# Altium PCB thymio2-main.PcbDoc (part 1 of 4)
Units mm, origin at the board's own origin, x right, y up, seen from the top; angles counter-clockwise.
Board outline 107 x 105.75 mm, 2 copper layers (Top Layer, Bottom Layer), stack 1.591 mm thick; 334 components, 247 nets, 987 pads, 487 vias.
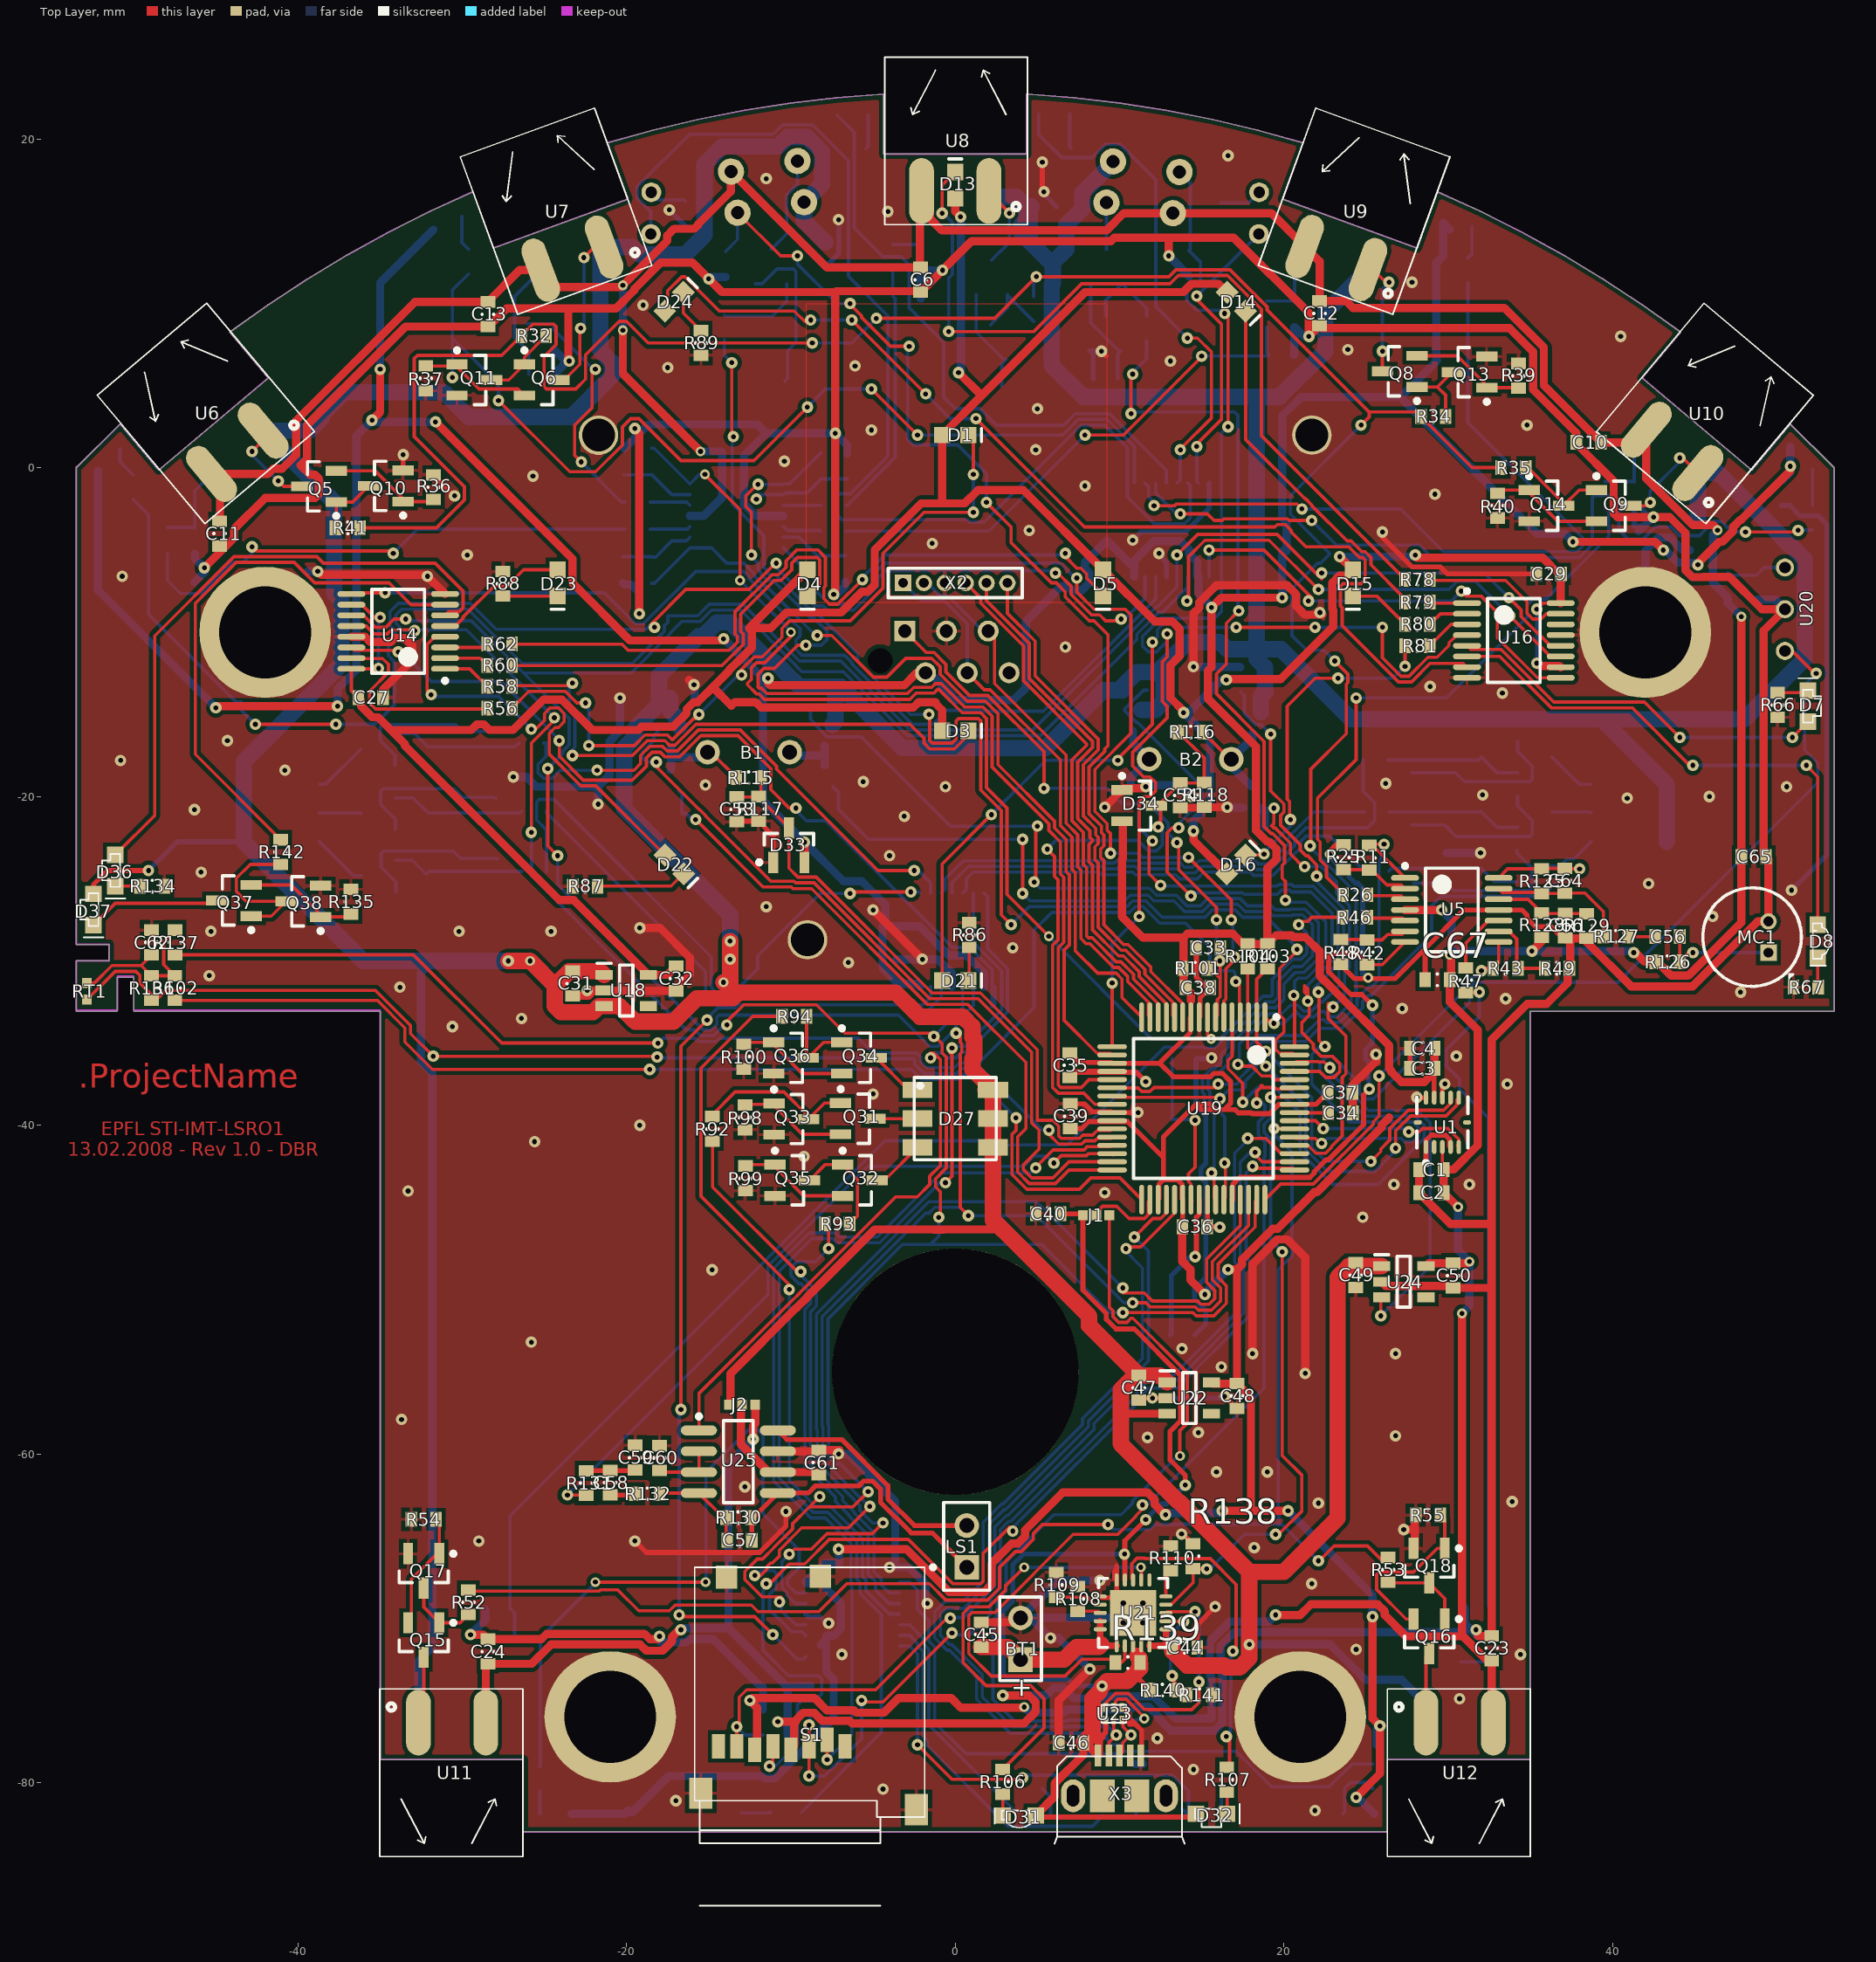
[diagram p0: Top Layer view]
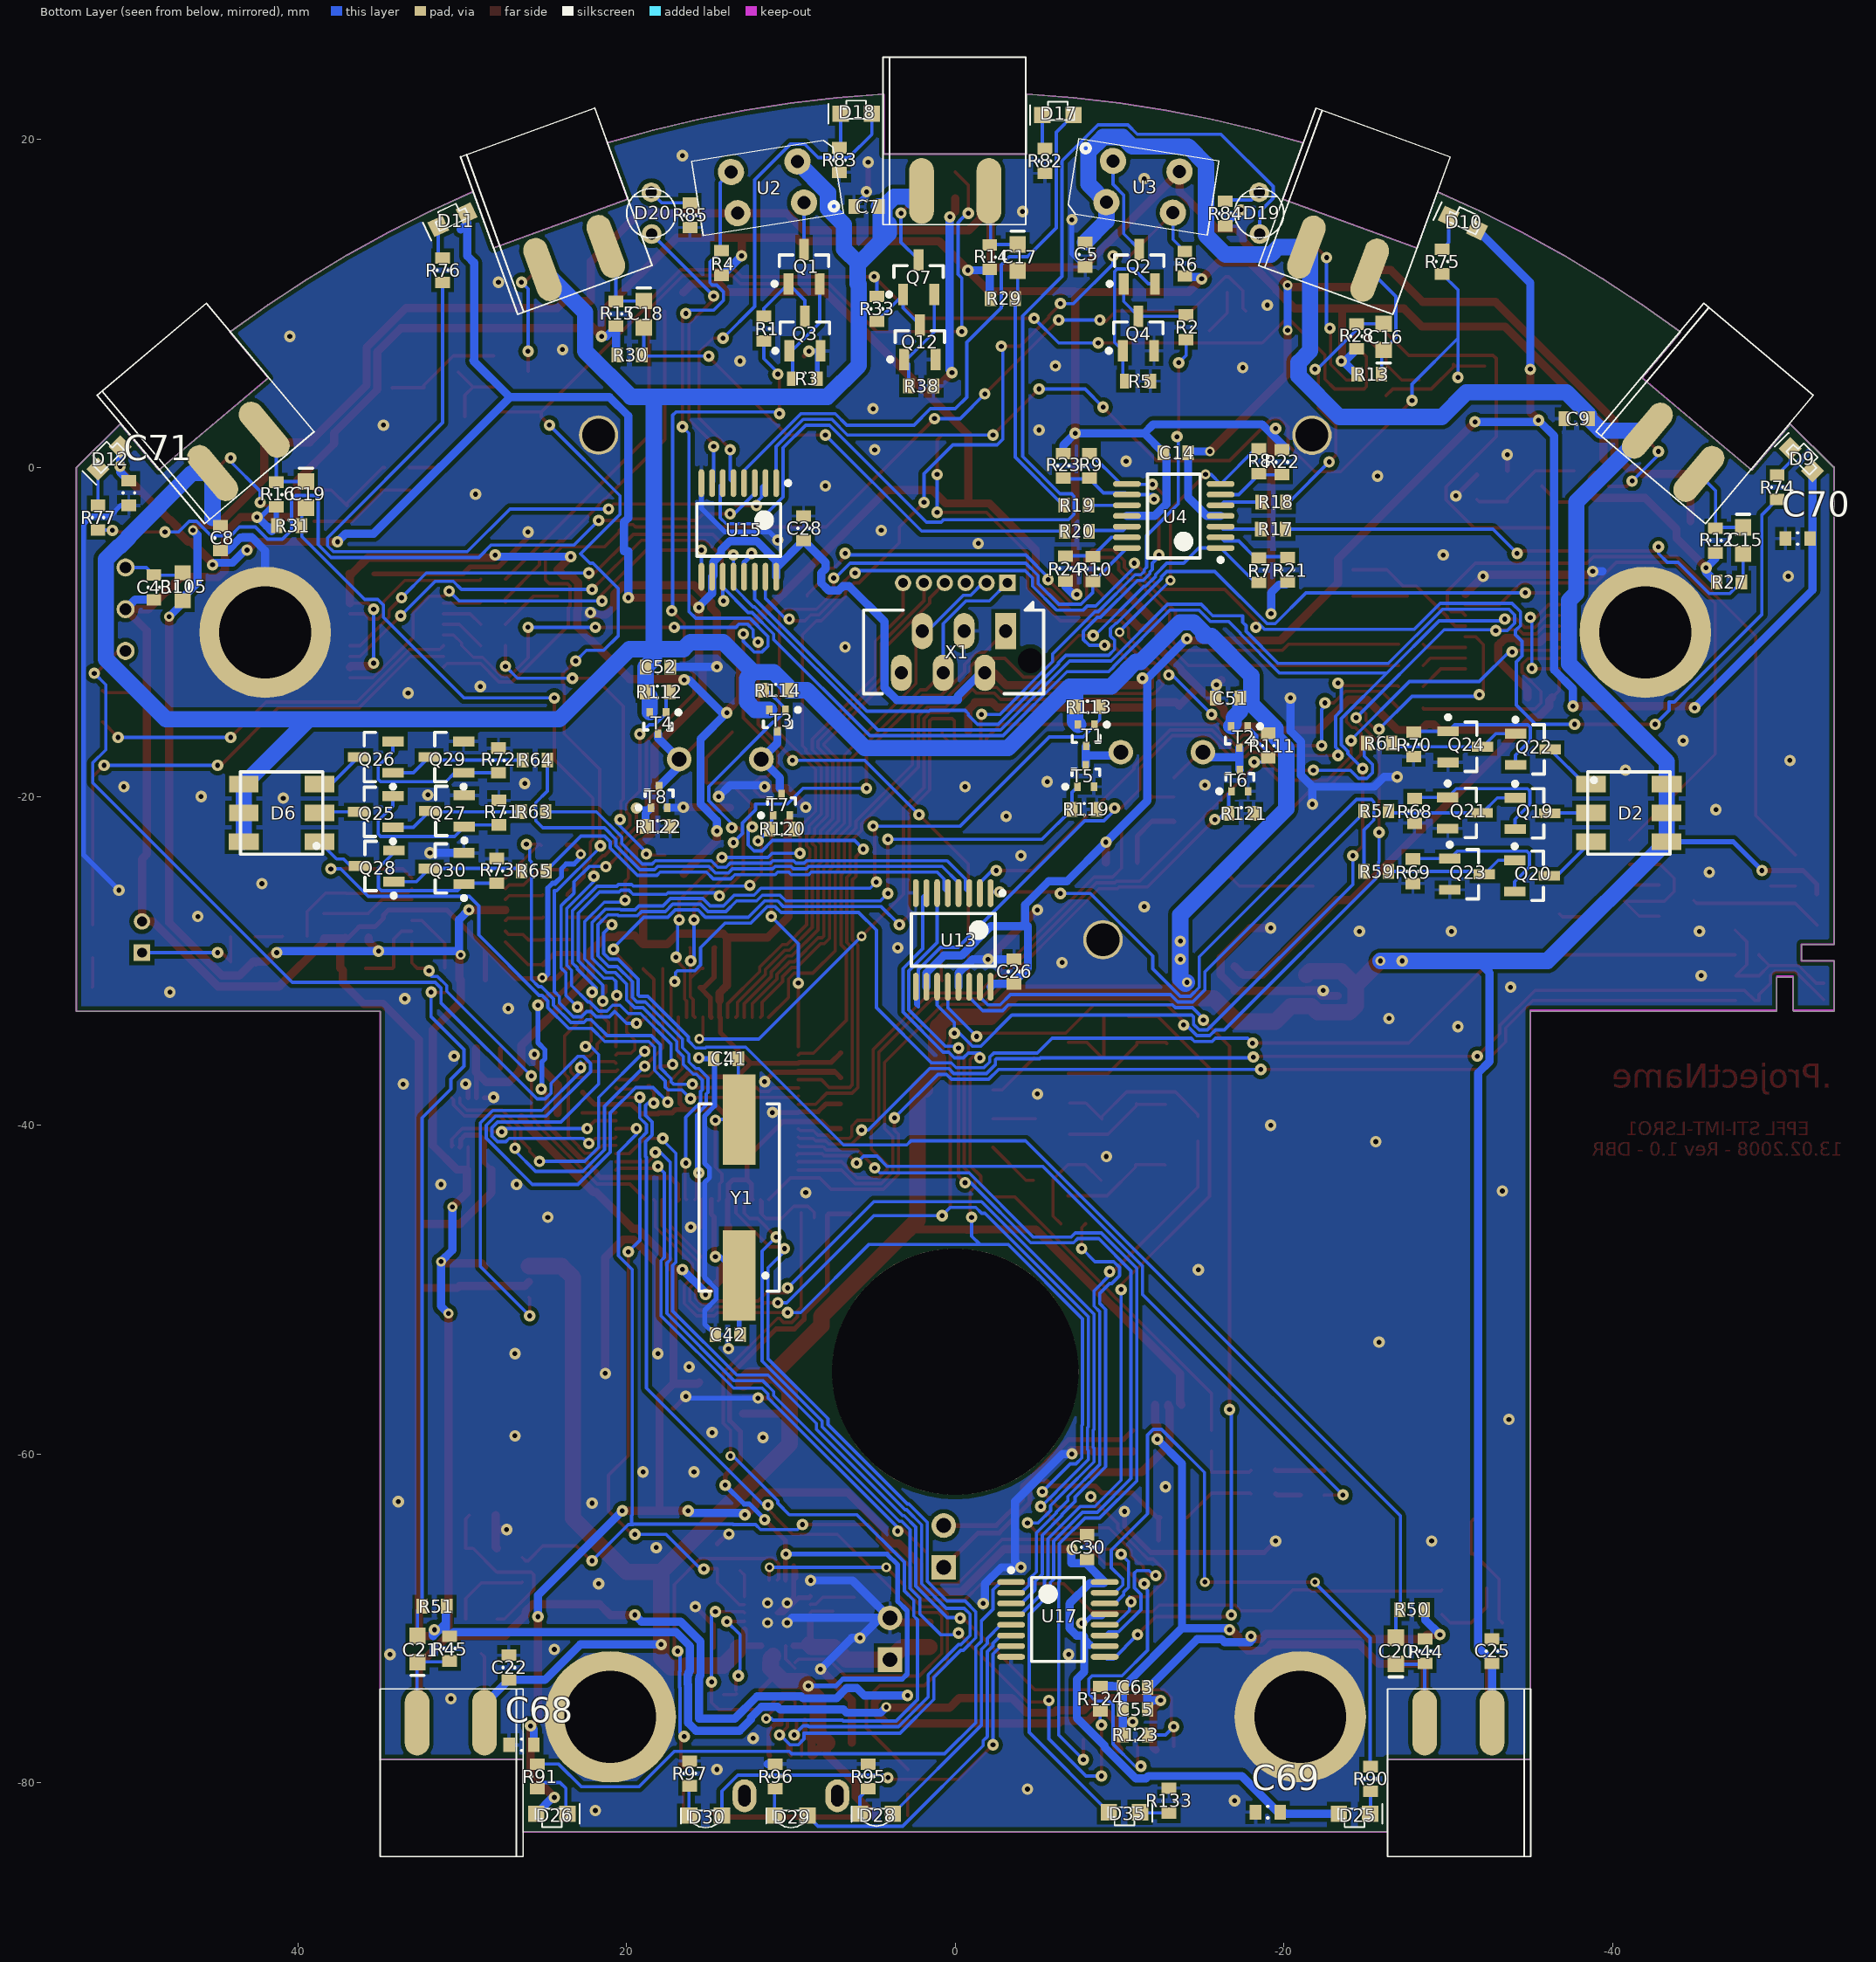
[diagram p1: Bottom Layer view, seen from below]

## Layer stack, top to bottom
Top Layer: signal copper 0.0356
Dielectric: core 1.52, FR-4, Dk 4.8
Bottom Layer: signal copper 0.0356

## Board outline
-53.5,-33.068 -51,-33.068 -51,-31 -50,-31 -50,-33.068 -35,-33.068 -35,-78.6 -26.3,-78.6 -26.3,-83 26.3,-83 26.3,-78.6 35,-78.6 35,-33.068 53.5,-33.068 53.5,0 50.816,2.669 48.472,-0.125 41.807,5.467 44.152,8.261 41.829,9.919 39.444,11.487 37,12.961 34.501,14.34 31.951,15.622 29.353,16.805 28.106,13.377 19.931,16.353 21.178,19.78 18.428,20.544 15.651,21.201 12.85,21.751 10.03,22.193 7.195,22.525 4.35,22.747 4.35,19.1 -4.35,19.1 -4.35,22.747 -7.195,22.525 -10.03,22.193 -12.85,21.751 -15.651,21.201 -18.428,20.544 -21.178,19.78 -19.931,16.353 -28.106,13.377 -29.353,16.805 -31.951,15.622 -34.501,14.34 -37,12.961 -39.444,11.487 -41.829,9.919 -44.152,8.261 -41.807,5.467 -48.472,-0.125 -50.816,2.669 -53.5,0 -53.5,-29 -51.5,-29 -51.5,-30 -53.5,-30

## Design rules (kind name [scope] priority, off if disabled: settings)
AcuteAngle [All] p1 off: minimum=8.80000000000000E+0001
Clearance Clearance_UnderCameraPolygon [INNamedPolygon('UnderCameraPolygon')] p1: gap=0.25
Clearance Clearance_Polygon [InPolygon AND not InNamedPolygon('UnderCameraPolygon')] p2: gap=0.25
Clearance Clearance_Normal [All] p3: gap=0.15
ComponentClearance ComponentLed_onde [(HasFootprint('DIOC1608X08N'))] p1: gap=0.1 collisioncheckmode=3 verticalgap=0.1 showdistances=TRUE
ComponentClearance ComponentSensors [(HasFootprint('ITR9909_EDGE'))OR (HasFootprint('ITR9909_LONG')) vs HasGenericStepModel  And  Not InComponentClass('All Components')] p2: gap=0.1 collisioncheckmode=3 verticalgap=0.1 showdistances=FALSE
ComponentClearance "ComponentClearance_Coque entre ellle" [HasGenericStepModel  And  Not InComponentClass('All Components') vs HasGenericStepModel  And  Not InComponentClass('All Components')] p3: gap=0 collisioncheckmode=3 verticalgap=0 showdistances=FALSE
ComponentClearance [All] p4: gap=0.2 collisioncheckmode=3 verticalgap=0.2 showdistances=TRUE
FabricationTestPointUsage TestPointUsage [All] p1: valid=0 allowmultiple=FALSE
FabricationTestpoint Testpoint [All] p1: side=3 testpointundercomponent=TRUE minsize=1.016 maxsize=2.54 preferedsize=1.524 minholesize=0 maxholesize=1.016 preferedholesize=0.813 testpointgrid=0.025 allowsidetop=TRUE allowsidebottom=TRUE usegrid=TRUE gridtolerance=0
Height [All] p1 off: minheight=0 maxheight=25.4 prefheight=12.7
HoleSize [All] p1: absolutevalues=TRUE maxlimit=6 minlimit=0.3 maxpercent=80.000 minpercent=20.000
MinimumAnnularRing [All] p1: minimumring=0.15
MinimumSolderMaskSliver [All] p1: minsoldermaskwidth=0.2
PlaneClearance [All] p1: clearance=0.4
PlaneConnect [All] p1: planeconnectstyle=Relief reliefexpansion=0.508 reliefentries=4 reliefconductorwidth=0.2 reliefairgap=0.254
PolygonConnect PolygonConnect_BigHole [ispad and (HoleSize >= 2.0)] p1: connectstyle=Direct reliefconductorwidth=0.254 reliefentries=4 polygonreliefangle="90 Angle"
PolygonConnect PolygonConnect_Via [IsVia] p2: connectstyle=Direct reliefconductorwidth=0.254 reliefentries=4 polygonreliefangle="90 Angle"
PolygonConnect PolygonConnect_DirectConnect [(ispad and (PadXSize_AllLayers >= 4.0))] p3: connectstyle=Direct reliefconductorwidth=0.254 reliefentries=4 polygonreliefangle="90 Angle"
PolygonConnect PolygonConnect_NoConnect [HasFootprint('SAMTEC_FTS*')] p4 off: connectstyle=NoConnect reliefconductorwidth=0.254 reliefentries=4 polygonreliefangle="90 Angle"
PolygonConnect [All] p5: connectstyle=Relief reliefconductorwidth=0.2 reliefentries=4 polygonreliefangle="90 Angle"
RoomDefinition SDcard [InComponentClass('SDcard')] p1: confinementstyle=ConfineIn formatcopy=TRUE lockcomponents=FALSE outline -16.492,-87.75 -16.492,-66.448 -1.358,-66.448 -1.358,-87.75
RoomDefinition Motors [InComponentClass('Motors')] p2 off: confinementstyle=ConfineIn formatcopy=TRUE lockcomponents=FALSE outline -22.9,-13.025 -22.9,-10.325 -22.6,-7.4 -19.275,-5.95 -15.025,-5.95 28.825,-6.2 29.025,-13.525 29.025,-16.225 28.825,-17.45 21.275,-17.6 18.425,-17.6 -22.725,-17.1
RoomDefinition ACC [InComponentClass('ACC')] p3: confinementstyle=ConfineIn formatcopy=TRUE lockcomponents=FALSE outline 27,-37.3 27,-34.55 29.85,-34.55 32,-37.475 32,-42.75 30.4,-44.875 27.55,-44.875 27.3,-42.75
RoutingCorners [All] p1: cornerstyle=45-Degree minsetback=1 maxsetback=2.54
RoutingVias [All] p1: holewidth=0.3 width=0.6 viastyle="Through Hole" minholewidth=0.3 minwidth=0.6 maxholewidth=1 maxwidth=4
SMDToCorner [All] p1 off: distance=78740
SMDToPlane [All] p1 off: distance=118110
SilkToSilkClearance [All] p1: silktosilkclearance=0.2
SilkscreenOverComponentPads [All] p1: minsilkscreentomaskgap=0.2
SolderMaskExpansion SolderMaskExpansion_Via [isVia] p1: expansion=-5
SolderMaskExpansion [All] p2: expansion=0.102
ViasUnderSMD [All] p1: allowed=FALSE
Width [All] p1: maxlimit=5 minlimit=0.15 preferedwidth=0.2 minimp=50.000000 maximp=50.000000 favimp=50.000000
17 further rules are at their usual default settings.

## Classes and differential pairs
component class ACC: C1 C2 C3 C4 U1
component class IR: C5 C6 C7 C8 C9 C10 C11 C12 C13 C14 C15 C16 C17 C18 C19 C20 C21 C22 C23 C24 C25 C67 Q1 Q2 Q3 Q4 Q5 Q6 Q7 Q8 Q9 Q10 Q11 Q12 Q13 Q14 Q15 Q16 Q17 Q18 R1 R2 R3 R4 R5 R6 R7 R8 R9 R10 R11 R12 R13 R14 R15 R16 R17 R18 R19 R20 R21 R22 R23 R24 R25 R26 R27 R28 R29 R30 R31 R32 R33 R34 R35 R36 R37 R38 R39 R40 R41 R42 R43 R44 R45 R46 R47 R48 R49 R50 R51 R52 R53 R54 R55 U2 U3 U4 U5 U6 U7 U8 U9 U10 U11 U12
component class LED: C26 C27 C28 C29 C30 C31 C32 C68 C69 C70 C71 D1 D2 D3 D4 D5 D6 D7 D8 D9 D10 D11 D12 D13 D14 D15 D16 D17 D18 D19 D20 D21 D22 D23 D24 D25 D26 D27 D28 D29 D30 D35 D36 D37 Q19 Q20 Q21 Q22 Q23 Q24 Q25 Q26 Q27 Q28 Q29 Q30 Q31 Q32 Q33 Q34 Q35 Q36 Q37 Q38 R56 R57 R58 R59 R60 R61 R62 R63 R64 R65 R66 R67 R68 R69 R70 R71 R72 R73 R74 R75 R76 R77 R78 R79 R80 R81 R82 R83 R84 R85 R86 R87 R88 R89 R90 R91 R92 R93 R94 R95 R96 R97 R98 R99 R100 R133 R134 R135 R142 U13 U14 U15 U16 U17 U18
component class Motors: B1 B2 C51 C52 C53 C54 D33 D34 R111 R112 R113 R114 R115 R116 R117 R118 R119 R120 R121 R122 T1 T2 T3 T4 T5 T6 T7 T8
component class POW: BT1 C44 C45 C46 C47 C48 C49 C50 D31 D32 R106 R107 R108 R109 R110 R138 R139 R140 R141 R? U21 U22 U23 U24 X3
component class SDcard: C55 C63 R123 R124 S1
component class Sound: C56 C57 C58 C59 C60 C61 C64 C65 C66 J2 LS1 MC1 R125 R126 R127 R128 R129 R130 R131 R132 U25
component class uc: C33 C34 C35 C36 C37 C38 C39 C40 C41 C42 C43 C62 J1 R101 R102 R103 R104 R105 R136 R137 RT1 U19 U20 X1 X2 Y1

## Components (designator, comment, footprint, x,y, rotation, side; value= is the part's Value field where it differs from the comment)
B1 "Motor" RB5-10.5 -12.575,-17.3 r0 top
B2 "Motor" RB5-10.5 14.3,-17.725 r180 top
BT1 "Battery" BAT-2 3.975,-71.25 r90 top
C1 "100nF" RESC1608X06L 28.975,-42.7 r180 top
C2 "10uF" RESC1608X06L 28.975,-44.1 r180 top
C3 "100nF" RESC1608X06L 28.425,-36.525 r180 top
C4 "10uF" RESC1608X06L 28.425,-35.325 r180 top
C5 "100nF" RESC1608X06L -7.9,12.975 r270 bottom
C6 "100nF" RESC1608X06L -2.1,11.45 r270 top
C7 "100nF" RESC1608X06L 5.4,15.9 r0 bottom
C8 "100nF" RESC1608X06L 44.725,-4.275 r270 bottom
C9 "100nF" RESC1608X06L -37.825,3 r0 bottom
C10 "100nF" RESC1608X06L 38.55,1.55 r180 top
C11 "100nF" RESC1608X06L -44.775,-4 r270 top
C12 "100nF" RESC1608X06L 22.175,9.4 r270 top
C13 "100nF" RESC1608X06L -28.45,9.35 r270 top
C14 "100nF" RESC1608X06L -13.425,0.925 r0 bottom
C15 "5nF" CAPC1608N -47.95,-4.425 r270 bottom
C16 "5nF" CAPC1608N -26.075,7.975 r90 bottom
C17 "5nF" CAPC1608N -3.8,12.8 r270 bottom
C18 "5nF" CAPC1608N 18.95,9.35 r270 bottom
C19 "5nF" CAPC1608N 39.525,-1.625 r270 bottom
C20 "5nF" CAPC1608N -26.825,-71.975 r90 bottom
C21 "5nF" CAPC1608N 32.725,-71.875 r90 bottom
C22 "100nF" RESC1608X06L 27.175,-73 r90 bottom
C23 "100nF" RESC1608X06L 32.65,-71.825 r90 top
C24 "100nF" RESC1608X06L -28.45,-72.025 r90 top
C25 "100nF" RESC1608X06L -32.675,-72 r90 bottom
C26 "100nF" RESC1608X06L -3.575,-30.65 r90 bottom
C27 "100nF" RESC1608X06L -35.575,-13.975 r0 top
C28 "100nF" RESC1608X06L 9.225,-3.675 r90 bottom
C29 "100nF" RESC1608X06L 36.125,-6.45 r180 top
C30 "100nF" RESC1608X06L -8.025,-65.675 r90 bottom
C31 "4.7uF" RESC1608X06L -23.275,-31.375 r270 top
C32 "4.7uF" RESC1608X06L -17,-31.075 r270 top
C33 "100nF" RESC1608X06L 15.394,-29.194 r180 top
C34 "10uF" RESC1608X06L 23.45,-39.25 r0 top
C35 "100nF" RESC1608X06L 6.975,-36.35 r270 top
C36 "100nF" RESC1608X06L 14.575,-46.175 r0 top
C37 "100nF" RESC1608X06L 23.425,-38 r0 top
C38 "100nF" RESC1608X06L 14.775,-31.625 r0 top
C39 "100nF" RESC1608X06L 7,-39.45 r90 top
C40 "100nF" RESC1608X06L 5.65,-45.375 r180 top
C41 "18pF" RESC1608X06L 13.95,-35.95 r0 bottom
C42 "18pF" RESC1608X06L 13.85,-52.75 r0 bottom
C43 "4.7uF" RESC1608X06L 48.775,-7.275 r270 bottom
C44 "4.7uF" RESC1608X06L 13.975,-71.775 r0 top
C45 "4.7uF" RESC1608X06L 1.575,-71 r90 top
C46 "10uF" RESC1608X06L 7.05,-77.575 r180 top
C47 "4.7uF" RESC1608X06L 11.175,-55.975 r270 top
C48 "4.7uF" RESC1608X06L 17.15,-56.475 r270 top
C49 "4.7uF" RESC1608X06L 24.375,-49.125 r270 top
C50 "4.7uF" RESC1608X06L 30.3,-49.15 r270 top
C51 "10uF" RESC1608X06L -16.6,-14 r0 bottom
C52 "10uF" RESC1608X06L 18.1,-12.125 r180 bottom
C53 "100nF" RESC1608X06L -13.3,-20.775 r270 top
C54 "100nF" RESC1608X06L 13.7,-19.925 r270 top
C55 "100nF" RESC1608X06L -10.95,-75.55 r180 bottom
C56 "4.7uF" RESC1608X06L 43.35,-28.525 r180 top
C57 "680pF" RESC1608X06L -13.125,-65.25 r0 top
C58 "220nF" RESC1608X06L -21,-61.75 r270 top
C59 "22nF" RESC1608X06L -19.475,-60.225 r270 top
C60 "1uF" RESC1608X06L -18,-60.25 r90 top
C61 "1uF" RESC1608X06L -8.3,-60.525 r90 top
C62 "?nF" RESC1608X06L -48.925,-28.875 r90 top
C63 "1uF" RESC1608X06L -10.95,-74.2 r180 bottom
C64 "50pF" RESC1608X06L 37.1,-25.125 r90 top
C65 "100nF" RESC1608X06L 48.6,-23.65 r0 top
C66 "100nF" RESC1608X06L 37.125,-27.85 r270 top
C67 "100nF" RESC1608X06L 29.35,-31.15 r180 top
C68 "100nF" RESC1608X06L 26.4,-77.7 r0 bottom
C69 "100nF" RESC1608X06L -19.025,-81.8 r0 bottom
C70 "100nF" RESC1608X06L -51.275,-4.3 r0 bottom
C71 "100nF" RESC1608X06L 50.3,-1.525 r270 bottom
D1 "19-21SURC/S530-A3/TR8" DIOC1608X08N 0,2 r180 top locked
D2 "BT5050RGBC-T180" LEDSMD5 -41,-21 r180 bottom locked
D3 "19-21SURC/S530-A3/TR8" DIOC1608X08N 0,-16 r180 top locked
D4 "19-21SURC/S530-A3/TR8" DIOC1608X08N -9,-7 r90 top locked
D5 "19-21SURC/S530-A3/TR8" DIOC1608X08N 9,-7 r90 top locked
D6 "BT5050RGBC-T180" LEDSMD5 41,-21 r0 bottom locked
D7 "27-21SURC/S530-A3" "27-21 EVERLIGHT" 51.9,-14.5 r270 top locked
D8 "LTST-S220KGKT" LITEON-SIDEVIEW 52.5,-28.8 r270 top locked
D9 "27-21SURC/S530-A3" "27-21 EVERLIGHT" -51.5,0.5 r225 bottom locked
D10 "27-21SURC/S530-A3" "27-21 EVERLIGHT" -30.9,14.9 r205 bottom locked
D11 "27-21SURC/S530-A3" "27-21 EVERLIGHT" 30.6,15.1 r155 bottom locked
D12 "27-21SURC/S530-A3" "27-21 EVERLIGHT" 51.5,0.6 r135 bottom locked
D13 "598-8070-107F" DIOC1608X08N 0,17.2 r270 top locked
D14 "598-8070-107F" DIOC1608X08N 17.112,10.112 r135 top locked
D15 "598-8070-107F" DIOC1608X08N 24.2,-7 r90 top locked
D16 "598-8070-107F" DIOC1608X08N 17.1,-24.125 r225 top locked
D17 "27-21SURC/S530-A3" "27-21 EVERLIGHT" -6.25,21.475 r180 bottom locked
D18 "27-21SURC/S530-A3" "27-21 EVERLIGHT" 6.025,21.55 r180 bottom locked
D19 "SSL-LX3044HD" LED_TH_3MM_20MM -18.5,15.5 r270 bottom locked
D20 "SSL-LX3044HD" LED_TH_3MM_20MM 18.5,15.5 r270 bottom locked
D21 "598-8070-107F" DIOC1608X08N 0,-31.2 r180 top locked
D22 "598-8070-107F" DIOC1608X08N -17.1,-24.125 r135 top locked
D23 "598-8070-107F" DIOC1608X08N -24.2,-7 r90 top locked
D24 "598-8070-107F" DIOC1608X08N -17.112,10.112 r225 top locked
D25 "27-21SURC/S530-A3" "27-21 EVERLIGHT" -24.3,-81.9 r0 bottom locked
D26 "27-21SURC/S530-A3" "27-21 EVERLIGHT" 24.55,-81.9 r0 bottom locked
D27 "BT5050RGBC-T180" LEDSMD5 0,-39.6 r0 top locked
D28 "LTST-S220KGKT" LITEON-SIDEVIEW 4.8,-81.9 r0 bottom locked
D29 "LTST-S220KGKT" LITEON-SIDEVIEW 10,-82 r0 bottom locked
D30 "LTST-S220KGKT" LITEON-SIDEVIEW 15.2,-82 r0 bottom locked
D31 "LTST-S220KGKT" LITEON-SIDEVIEW 3.9,-82 r180 top locked
D32 "27-21SURC/S530-A3" "27-21 EVERLIGHT" 15.6,-81.9 r180 top locked
D33 "BAT54S" SOT23_N -10.125,-22.95 r90 top
D34 "BAT54S" SOT23_N 11.2,-20.55 r0 top
D35 "27-21SURC/S530-A3" "27-21 Everlight" -10.3,-81.8 r0 bottom locked
D36 "27-21SURC/S530-A3" "27-21 Everlight" -51.125,-24.5 r90 top
D37 "27-21/BHC-AN1P2/3C" "27-21 Everlight Blue" -52.45,-26.875 r90 top
J1 "SolderJP3" CC_SolderJP3 8.575,-45.475 r180 top
J2 "SolderJP3" CC_SolderJP3 -12.975,-57 r180 top
LS1 "Speaker" PIN2 0.7,-66.9 r90 top
MC1 "TD4015BPN" MICRO_PANASONIC_WM-64PN 48.5,-28.55 r180 top locked
Q1 "BC817-40" SOT23_N 9.2,12.25 r90 bottom
Q2 "BC817-40" SOT23_N -11.2,12.25 r90 bottom
Q3 "BC817-40" SOT23_N 9.15,8.175 r90 bottom
Q4 "BC817-40" SOT23_N -11.15,8.175 r90 bottom
Q5 "BC817-40" SOT23_N -38.725,-1.125 r180 top
Q6 "BC817-40" SOT23_N -25.175,5.35 r0 top
Q7 "BC817-40" SOT23_N 2.225,11.6 r90 bottom
Q8 "BC817-40" SOT23_N 27.05,5.875 r180 top
Q9 "BC817-40" SOT23_N 40.075,-2.3 r0 top
Q10 "BC817-40" SOT23_N -34.65,-1.1 r180 top
Q11 "BC817-40" SOT23_N -29.275,5.35 r0 top
Q12 "BC817-40" SOT23_N 2.15,7.65 r90 bottom
Q13 "BC817-40" SOT23_N 31.3,5.825 r180 top
Q14 "BC817-40" SOT23_N 35.975,-2.3 r0 top
Q15 "BC817-40" SOT23_N -32.35,-71.325 r270 top
Q16 "BC817-40" SOT23_N 28.85,-71.1 r270 top
Q17 "BC817-40" SOT23_N -32.35,-67.125 r270 top
Q18 "BC817-40" SOT23_N 28.85,-66.8 r270 top
Q19 "BC817-40" SOT23_N -35.125,-21.025 r180 bottom
Q20 "BC817-40" SOT23_N -35.1,-24.825 r180 bottom
Q21 "BC817-40" SOT23_N -31.025,-21 r180 bottom
Q22 "BC817-40" SOT23_N -35.15,-17.125 r180 bottom
Q23 "BC817-40" SOT23_N -31.15,-24.725 r180 bottom
Q24 "BC817-40" SOT23_N -31.05,-16.975 r180 bottom
Q25 "BC817-40" SOT23_N 35.275,-20.925 r0 bottom
Q26 "BC817-40" SOT23_N 35.275,-17.6 r0 bottom
Q27 "BC817-40" SOT23_N 30.925,-20.875 r0 bottom
Q28 "BC817-40" SOT23_N 35.225,-24.225 r0 bottom
Q29 "BC817-40" SOT23_N 30.975,-17.6 r0 bottom
Q30 "BC817-40" SOT23_N 30.95,-24.375 r0 bottom
Q31 "BC817-40" SOT23_N -5.925,-39.6 r0 top
Q32 "BC817-40" SOT23_N -5.8,-43.35 r0 top
Q33 "BC817-40" SOT23_N -9.975,-39.625 r0 top
Q34 "BC817-40" SOT23_N -5.85,-35.9 r0 top
Q35 "BC817-40" SOT23_N -9.925,-43.35 r0 top
Q36 "BC817-40" SOT23_N -10,-35.9 r0 top
Q37 "BC817-40" SOT23_N -43.9,-26.325 r180 top
Q38 "BC817-40" SOT23_N -39.675,-26.375 r180 top
R1 "4.7K" RESC1608X06L 11.65,8.475 r90 bottom
R2 "4.7K" RESC1608X06L -14.05,8.55 r90 bottom
R3 "33" RESC1608X06L 9.15,5.425 r0 bottom
R4 "1k" RESC1608X06L 14.225,12.475 r90 bottom
R5 "33" RESC1608X06L -11.125,5.275 r0 bottom
R6 "1k" RESC1608X06L -13.975,12.425 r90 bottom
R7 "10k" RESC1608X06L -18.475,-6.225 r90 bottom
R8 "10k" RESC1608X06L -18.475,0.4 r270 bottom
R9 "10k" RESC1608X06L -8.175,0.125 r270 bottom
R10 "10k" RESC1608X06L -8.375,-6.15 r90 bottom
R11 "10k" RESC1608X06L 25.2,-23.725 r270 top
R12 "1k" RESC1608X06L -46.275,-4.425 r270 bottom
R13 "1k" RESC1608X06L -25.2,5.7 r0 bottom
R14 "1k" RESC1608X06L -2.1,12.825 r270 bottom
R15 "1k" RESC1608X06L 20.65,9.375 r270 bottom
R16 "1k" RESC1608X06L 41.325,-1.625 r270 bottom
R17 "1k" RESC1608X06L -19.35,-3.725 r0 bottom
R18 "1k" RESC1608X06L -19.375,-2.075 r0 bottom
R19 "1k" RESC1608X06L -7.375,-2.275 r180 bottom
R20 "1k" RESC1608X06L -7.4,-3.85 r180 bottom
R21 "1k" RESC1608X06L -20.225,-6.2 r90 bottom
R22 "1k" RESC1608X06L -19.875,0.35 r270 bottom
R23 "1k" RESC1608X06L -6.575,0.125 r270 bottom
R24 "1k" RESC1608X06L -6.7,-6.125 r90 bottom
R25 "1k" RESC1608X06L 23.625,-23.7 r270 top
R26 "1k" RESC1608X06L 24.35,-25.975 r0 top
R27 "1k" RESC1608X06L -47.1,-6.95 r0 bottom
R28 "1k" RESC1608X06L -24.425,8 r270 bottom
R29 "1k" RESC1608X06L -2.9,10.3 r0 bottom
R30 "1k" RESC1608X06L 19.825,6.875 r0 bottom
R31 "1k" RESC1608X06L 40.55,-3.525 r0 bottom
R32 "2.2K" RESC1608X06L -25.65,8.05 r0 top
R33 "2.2K" RESC1608X06L 4.775,9.675 r270 bottom
R34 "2.2K" RESC1608X06L 29.1,3.125 r0 top
R35 "2.2K" RESC1608X06L 33.975,0.025 r0 top
R36 "6.2" RESC1608X06L -31.75,-1.175 r270 top
R37 "6.2" RESC1608X06L -32.225,5.45 r90 top
R38 "6.2" RESC1608X06L 2.075,4.975 r0 bottom
R39 "6.2" RESC1608X06L 34.275,5.6 r270 top
R40 "6.2" RESC1608X06L 33,-2.3 r90 top
R41 "2.2K" RESC1608X06L -36.975,-3.65 r0 top
R42 "10k" RESC1608X06L 25.075,-29.475 r90 top
R43 "10k" RESC1608X06L 33.5,-30.45 r0 top
R44 "1k" RESC1608X06L -28.6,-72 r90 bottom
R45 "1k" RESC1608X06L 30.775,-71.85 r90 bottom
R46 "1k" RESC1608X06L 24.325,-27.35 r0 top
R47 "1k" RESC1608X06L 31.075,-31.175 r90 top
R48 "1k" RESC1608X06L 23.475,-29.45 r90 top
R49 "1k" RESC1608X06L 36.625,-30.45 r180 top
R50 "1k" RESC1608X06L -27.8,-69.475 r180 bottom
R51 "1k" RESC1608X06L 31.7,-69.275 r180 bottom
R52 "2.2K" RESC1608X06L -29.625,-69.025 r270 top
R53 "2.2K" RESC1608X06L 26.35,-67.05 r270 top
R54 "6.2" RESC1608X06L -32.35,-63.975 r0 top
R55 "6.2" RESC1608X06L 28.775,-63.725 r0 top
R56 "68" RESC1608X06L -27.725,-14.625 r0 top
R57 "4.7K" RESC1608X06L -25.625,-20.875 r180 bottom
R58 "68" RESC1608X06L -27.725,-13.3 r0 top
R59 "4.7K" RESC1608X06L -25.625,-24.55 r180 bottom
R60 "68" RESC1608X06L -27.725,-12.025 r0 top
R61 "4.7K" RESC1608X06L -25.8,-16.75 r180 bottom
R62 "68" RESC1608X06L -27.725,-10.725 r0 top
R63 "4.7K" RESC1608X06L 25.675,-20.925 r0 bottom
R64 "4.7K" RESC1608X06L 25.575,-17.775 r0 bottom
R65 "4.7K" RESC1608X06L 25.65,-24.525 r0 bottom
R66 "68" RESC1608X06L 50.05,-14.425 r90 top
R67 "68" RESC1608X06L 51.775,-31.6 r0 top
R68 "33" RESC1608X06L -27.95,-20.875 r90 bottom
R69 "33" RESC1608X06L -27.85,-24.55 r90 bottom
R70 "33" RESC1608X06L -27.9,-16.825 r90 bottom
R71 "33" RESC1608X06L 27.775,-20.975 r270 bottom
R72 "33" RESC1608X06L 27.8,-17.8 r270 bottom
R73 "33" RESC1608X06L 27.9,-24.525 r270 bottom
R74 "68" RESC1608X06L -50.025,-1.175 r90 bottom
R75 "68" RESC1608X06L -29.625,12.55 r90 bottom
R76 "68" RESC1608X06L 31.2,12.025 r90 bottom
R77 "68" RESC1608X06L 52.175,-3.025 r90 bottom
R78 "68" RESC1608X06L 28.125,-6.775 r180 top
R79 "68" RESC1608X06L 28.125,-8.175 r180 top
R80 "68" RESC1608X06L 28.125,-9.525 r180 top
R81 "68" RESC1608X06L 28.125,-10.825 r180 top
R82 "68" RESC1608X06L -5.45,18.675 r90 bottom
R83 "68" RESC1608X06L 7.05,18.725 r90 bottom
R84 "68" RESC1608X06L -16.425,15.475 r90 bottom
R85 "68" RESC1608X06L 16.15,15.375 r90 bottom
R86 "68" RESC1608X06L 0.85,-28.425 r270 top
R87 "68" RESC1608X06L -22.525,-25.45 r0 top
R88 "68" RESC1608X06L -27.525,-7.05 r270 top
R89 "68" RESC1608X06L -15.475,7.6 r90 top
R90 "68" RESC1608X06L -25.275,-79.775 r270 bottom
R91 "68" RESC1608X06L 25.425,-79.625 r270 bottom
R92 "4.7K" RESC1608X06L -14.775,-40.225 r90 top
R93 "4.7K" RESC1608X06L -7.175,-46 r0 top
R94 "4.7K" RESC1608X06L -9.8,-33.375 r0 top
R95 "68" RESC1608X06L 5.3,-79.625 r270 bottom
R96 "68" RESC1608X06L 10.95,-79.625 r270 bottom
R97 "68" RESC1608X06L 16.175,-79.45 r270 bottom
R98 "33" RESC1608X06L -12.8,-39.525 r90 top
R99 "33" RESC1608X06L -12.775,-43.225 r90 top
R100 "33" RESC1608X06L -12.875,-35.825 r90 top
R101 "10K" RESC1608X06L 14.6,-30.45 r180 top
R102 "10K" RESC1608X06L -47.5,-31.65 r270 top
R103 "4.7K" RESC1608X06L 19,-29.725 r90 top
R104 "4.7K" RESC1608X06L 17.8,-29.725 r90 top
R105 "100" RESC1608X06N 47.025,-7.225 r270 bottom
R106 "180R" RESC1608X06L 2.875,-79.95 r90 top
R107 "180R" RESC1608X06L 16.525,-79.825 r90 top
R108 "1K" RESC1608X06L 7.45,-68.825 r270 top
R109 "10K" RESC1608X06L 6.15,-67.975 r270 top
R110 "10K" RESC1608X06L 13.1,-66.35 r270 top
R111 "4.7K" RESC1608X06L -19.05,-16.9 r90 bottom
R112 "4.7K" RESC1608X06L 18.125,-13.625 r0 bottom
R113 "4.7K" RESC1608X06L -8.05,-14.55 r0 bottom
R114 "4.7K" RESC1608X06L 10.925,-13.525 r180 bottom
R115 "2.7K" RESC1608X06L -12.575,-18.85 r180 top
R116 "2.7K" RESC1608X06L 14.325,-16.075 r0 top
R117 "8.2K" RESC1608X06L -11.975,-20.75 r90 top
R118 "8.2K" RESC1608X06L 15.15,-19.9 r90 top
R119 "100K" RESC1608X06L -7.85,-20.775 r180 bottom
R120 "100K" RESC1608X06L 10.55,-21.975 r180 bottom
R121 "100K" RESC1608X06L -17.4,-21.025 r180 bottom
R122 "100K" RESC1608X06L 18.1,-21.825 r180 bottom
R123 "100K" RESC1608X06L -10.95,-77.1 r0 bottom
R124 "100K" RESC1608X06L -8.825,-74.9 r90 bottom
R125 "470K" RESC1608X06L 35.7,-25.15 r90 top
R126 "2.2K" RESC1608X06L 43.35,-30.05 r180 top
R127 "10K" RESC1608X06L 40.2,-28.5 r0 top
R128 "10K" RESC1608X06L 35.7,-27.825 r270 top
R129 "10K" RESC1608X06L 38.425,-27.875 r90 top
R130 "22K" RESC1608X06L -13.2,-63.875 r0 top
R131 "1K" RESC1608X06L -22.45,-61.775 r90 top
R132 "22K" RESC1608X06L -18.75,-62.425 r0 top
R133 "68" RESC1608X06L -13,-81.1 r270 bottom
R134 "68" RESC1608X06L -48.875,-25.45 r180 top
R135 "68" RESC1608X06L -36.775,-26.4 r270 top
R136 "10K" RESC1608X06L -48.925,-31.65 r270 top
R137 "180R" RESC1608X06L -47.475,-28.875 r270 top
R138 "100K" RESC1608X06L 14.475,-66.225 r270 top
R139 "100K" RESC1608X06L 10.5,-72.7 r0 top
R140 "250K" RESC1608X06L 12.6,-74.375 r180 top
R141 "100K" RESC1608X06L 14.85,-74.65 r180 top
R142 "4.7K" RESC1608X06L -41.05,-23.375 r90 top
RT1 "NCP15XH103F03RC" RESC1005X04L -52.85,-31.85 r90 top
S1 "MicroSD-Astron 5190008-XA4-R" "Astron 5190008-XA4-R" -14.56,-68.2 r0 top locked
T1 "DMG1013T" SOT50P160X80-3N -7.975,-16.275 r270 bottom
T2 "DMG1013T" SOT50P160X80-3N -17.3,-16.375 r270 bottom
T3 "DMG1013T" SOT50P160X80-3N 10.825,-15.375 r270 bottom
T4 "DMG1013T" SOT50P160X80-3N 18.1,-15.525 r270 bottom
T5 "DMG1012T" SOT50P160X80-3N -7.95,-18.75 r90 bottom
T6 "DMG1012T" SOT50P160X80-3N -17.325,-19.025 r90 bottom
T7 "DMG1012T" SOT50P160X80-3N 10.575,-20.5 r90 bottom
T8 "DMG1012T" SOT50P160X80-3N 18.025,-20.025 r90 bottom
U1 "MMA7660FC" DFN50P300X300X100-12N 29.65,-39.825 r90 top
U2 "ITR9909" ITR9909_LONG 11.425,17.075 r351 bottom locked
U3 "ITR9909" ITR9909_LONG -11.426,17.1 r189 bottom locked
U4 "MCP6L04T-E/ST" TSSOP-ST14_N -13.301,-2.925 r0 bottom
U5 "MCP6L04T-E/ST" TSSOP-ST14_N 30.225,-26.9 r0 top
U6 "ITR9909" ITR9909_EDGE -45.139,2.671 r220 top locked
U7 "ITR9909" ITR9909_EDGE -24.069,14.847 r200 top locked
U8 "ITR9909" ITR9909_EDGE 0,19.1 r180 top locked
U9 "ITR9909" ITR9909_EDGE 23.965,14.885 r160 top locked
U10 "ITR9909" ITR9909_EDGE 45.074,2.726 r140 top locked
U11 "ITR9909" ITR9909_EDGE -30.621,-78.6 r0 top locked
U12 "ITR9909" ITR9909_EDGE 30.702,-78.6 r0 top locked
U13 "MC74HC595ADTR2" 948F-01_N 0.125,-28.725 r270 bottom
U14 "MC74HC595ADTR2" 948F-01_N -33.9,-9.95 r180 top
U15 "MC74HC595ADTR2" 948F-01_N 13.175,-3.775 r270 bottom
U16 "MC74HC595ADTR2" 948F-01_N 34,-10.5 r0 top
U17 "MC74HC595ADTR2" 948F-01_N -6.25,-70.075 r180 bottom
U18 "AP7331-33WG-7" SOT95P285X100-5N -20.025,-31.8 r0 top
U19 "PIC24FJ64GB106-I/PT" TQFP-PT64_N 15.1,-38.975 r270 top
U20 "IRM-3636T" IR-receiver 50.5,-8.6 r90 top locked
U21 "MCP73871-2AAI/ML" QFN-ML20_N 10.825,-69.675 r180 top locked
U22 "AP7331-33WG-7" SOT95P285X100-5N 14.25,-56.6 r0 top
U23 "FAN3988" "MLP 1.45x1mm" 9.65,-75.811 r90 top
U24 "AP7331-33WG-7" SOT95P285X100-5N 27.3,-49.525 r0 top
U25 "LM4819M or NCP2980" M08A_N -13.2,-60.475 r0 top
X1 "Con1x6" TYCO_7-215079-6 0.1,-11.2 r270 bottom
X2 "Con1x6" MHDR1X6 -3.175,-7 r0 top locked
X3 "Alstron R3190005-021-R" "ASTRON 3190005-X21-R" 10,-82.3 r0 top locked
Y1 "815-ABLS-8-B2" HC49/4H_SMX 13.15,-44.4 r90 bottom

## Footprints (in the part's own frame and the unit in brackets; to place one, negate y for a bottom-side part, rotate by r counter-clockwise, add the part's x,y. Pads: shape width x height; smd on the part's side, far side on the other; paste and mask are expansions set on the pad)
"27-21 EVERLIGHT" [mm] "1.7mm x 1.1mm right mounted led"
  rect 1x1 smd: 1(-0.95,0) 2(0.95,0)
  silkscreen extent -1.7,-0.6 1,0.8, body extent -0.9,-0.3 0.9,0.8, height 0.55
"27-21 Everlight" [mm] "1.7mm x 1.1mm right mounted led"
  rect 1x1 smd: 1(-0.95,0) 2(0.95,0)
  silkscreen extent -1.7,-0.6 1,0.8, body extent -0.9,-0.3 0.9,0.8, height 0.55
"27-21 Everlight Blue" [mm] "1.7mm x 1.1mm right mounted led"
  rect 1x1 smd: 1(-0.95,0) 2(0.95,0)
  silkscreen extent -1.7,-0.6 1,0.8, body extent -0.9,-0.3 0.9,0.8, height 0.55
948F-01_N [mm] "TSOP, 16-Leads, Body 5x4.4mm, Pitch 0.65mm, IPC Medium Density"
  oval 1.7x0.35 smd: 1(-2.85,2.275) 2(-2.85,1.625) 3(-2.85,0.975) 4(-2.85,0.325) 5(-2.85,-0.325) 6(-2.85,-0.975) 7(-2.85,-1.625) 8(-2.85,-2.275) 9(2.85,-2.275) 10(2.85,-1.625) 11(2.85,-0.975) 12(2.85,-0.325) 13(2.85,0.325) 14(2.85,0.975) 15(2.85,1.625) 16(2.85,2.275)
  silkscreen extent -2.97,-2.55 1.6,3.12, body extent -2.25,-2.55 2.25,2.55, height 1.2
"ASTRON 3190005-X21-R" [mm] "Micro USB 5 pin Female"
  rect 0.4x1.35 smd: 1(-1.3,3.95) 2(-0.65,3.95) 3(0,3.95) 4(0.65,3.95) 5(1.3,3.95)
  oval 1.45x2 hole 0.75 slot 1.3 at 90 deg: S(-2.825,1.5) S(2.825,1.5)
  rect 1.5x2 smd: S(-1.05,1.5) S(1.05,1.5)
  silkscreen extent -3.96,-1.42 3.96,3.9, body extent -4.03,-1.45 4.03,3.9, height 2.7
"Astron 5190008-XA4-R" [mm] "MICRO SD/TransFlash Memory Card Connector"
  rect 0.8x1.5 smd: 1(7.86,-9.6) 2(6.76,-9.2) 3(5.66,-9.6) 4(4.56,-9.8) 5(3.46,-9.6) 6(2.36,-9.8) 7(1.26,-9.6) 8(0.16,-9.6)
  rect 1.4x1.9 smd: S(-0.93,-12.45) S(12.2,-13.45)
  rect 1.3x1.4 smd: S(0.65,0.7) S(6.35,0.75)
  silkscreen extent -1.3,-19.3 12.7,1.3, body extent -1.33,-15.5 12.72,1.3, height 1.88
BAT-2 [mm] "Multicell Battery; 2 Leads"
  rect 1.5x1.5 hole 0.9: 1(-1.27,0)
  round 1.5 hole 0.9: 2(1.27,0)
  silkscreen extent -2.54,-1.27 2.54,1.27
CAPC1608N [mm] "Chip Capacitor, Body 1.6x0.8mm, IPC Medium Density"
  rect 1x1 smd: 1(-0.8,0) 2(0.8,0)
  silkscreen extent -1.6,-0.4 -1.6,0.4, body extent -0.87,-0.48 0.87,0.48, height 0.85
CC_SolderJP3 [mm] "Small Solder Jumper 3 leads"
  rect 0.6x0.6 smd paste-0.6 mask+0.05: 1(-0.8,0) 2(0,0) 3(0.8,0)
  body extent -0.9,-0.25 0.9,0.25, height 1
DFN50P300X300X100-12N [mm] "DFN, 12-Leads, Body 3.1x3.1mm (max), Pitch 0.50mm, IPC Medium Density"
  oval 0.28x0.5 smd: 0(0,1.5) 0(0,-1.5)
  oval 0.85x0.28 smd: 1(-1.5,1) 2(-1.5,0.5) 3(-1.5,0) 4(-1.5,-0.5) 5(-1.5,-1) 6(1.5,-1) 7(1.5,-0.5) 8(1.5,0) 9(1.5,0.5) 10(1.5,1)
  silkscreen extent -2.6,-1.55 1.55,1.55, body extent -1.55,-1.6 1.55,1.5, height 1
DIOC1608X08N [mm] "Chip Diode, Body 1.6x0.8mm, IPC Medium Density"
  rect 1x1 smd: 1(-0.8,0) 2(0.8,0)
  silkscreen extent -1.6,-0.4 -1.6,0.4, body extent -0.87,-0.48 0.87,0.48, height 0.85
HC49/4H_SMX [mm] "Surface Mount Quartz Crystal; Body 13.4 (inc. leads) x 4.9 mm (LxW max)"
  rect 5.5x2 smd: 1(-4.75,0) 2(4.75,0)
  silkscreen extent -5.7,-2.45 5.7,2.45, body extent -5.8,-2.55 5.8,2.55, height 4.3
IR-receiver [mm] "Infrared Remote control Receiver Module 6x5.6x8.25mm"
  round 1.1 hole 0.7: 1(-2.54,0) 2(0,0) 3(2.54,0)
  body extent -3,-4.1 3,1.5, height 8.3
ITR9909_EDGE [mm] "ITR9909 place on the border of the PCB"
  oval 1.5x4 smd: 1(-2.05,2.25) 4(2.05,2.25)
  oval 1.5x4 smd far side: 2(-2.05,2.25) 3(2.05,2.25)
  silkscreen extent -4.4,-5.9 4.3,4.3, body extent -8.02,-10.18 8.38,6.26, height 1.45
ITR9909_LONG [mm] "ITR9909 place at the end of the pad"
  round 1.6 hole 0.8: 1(-2.05,1.27) 2(-2.05,-1.27) 3(2.05,-1.27) 4(2.05,1.27)
  silkscreen extent -4.32,-2.29 4.32,2.29, body extent -5.03,-3.52 5.05,3.59, height 23.9
LED_TH_3MM_20MM [mm] "Truhole led at 3mm"
  round 1.2 hole 0.7: 1(-1.27,0) 2(1.27,0.025)
  silkscreen extent -1.5,-1.5 1.5,1.5, body extent -1.61,-1.59 1.5,1.59, height 22.75
LEDSMD5 [mm] "LED SMD, 6-Leads, Body 5x5mm (max), Pitch 1.75mm, IPC High Density"
  rect 1.8x1 smd: 1(-2.3,1.75) 2(-2.3,0) 3(-2.3,-1.75) 4(2.3,-1.75) 5(2.3,0)
  rect 1.85x1 smd: 6(2.3,1.75)
  silkscreen extent -2.5,-2.5 2.5,2.5, body extent -2.5,-2.5 2.5,2.5, height 1.9
LITEON-SIDEVIEW [mm] "2.1mm x 1.0mm right mounted led"
  rect 1x1 smd: 1(1,0) 2(-1,0)
  silkscreen extent -1.07,-0.45 1.5,0.75, body extent -1.05,-0.25 1.05,0.75, height 0.55
M08A_N [mm] "SOIC, 8-Leads, Body 4.9x3.9mm, Pitch 1.27mm, IPC Medium Density"
  oval 2.2x0.6 smd: 1(-2.4,1.905) 2(-2.4,0.635) 3(-2.4,-0.635) 4(-2.4,-1.905) 5(2.4,-1.905) 6(2.4,-0.635) 7(2.4,0.635) 8(2.4,1.905)
  silkscreen extent -2.52,-2.5 0.9,2.88, body extent -2,-2.5 2,2.5, height 1.75
MHDR1X6 [mm] "Connector; Header; 6 Position"
  rect 1x1 hole 0.6: 1(0,0)
  round 1 hole 0.6: 2(1.27,0) 3(2.54,0) 4(3.81,0) 5(5.08,0) 6(6.35,0)
  silkscreen extent -0.9,-0.9 7.25,0.9
MICRO_PANASONIC_WM-64PN [mm] "Omnidirectional Back Electret Condenser Microphone Cartridge"
  rect 1x1 hole 0.6: 1(-1,0.95)
  round 1 hole 0.6: 2(-1,-0.95)
  silkscreen extent -3,-3 3,3, body extent -3.01,-3.01 3.01,3.01, height 2.2
"MLP 1.45x1mm" [mm] "6-lead MicroPack MLP Farshild"
  rect 0.52x0.3 smd: 1(-0.375,0.5) 2(-0.375,0) 3(-0.375,-0.5) 4(0.375,-0.5) 5(0.375,0) 6(0.375,0.5)
  silkscreen extent -0.55,-0.75 0.55,0.75, body extent -0.5,-0.72 0.5,0.72, height 0.55
PIN2 [mm] "Photosensitive Diode; 2 Leads"
  rect 1.5x1.5 hole 0.9: 1(0,0)
  round 1.5 hole 0.9: 2(2.54,0)
  silkscreen extent -1.4,-1.4 3.94,2.17
QFN-ML20_N [mm] "QFN, 20-Leads, Body 4x4mm, Pitch 0.5mm, IPC Medium Density"
  oval 0.8x0.25 smd: 1(-2,1) 2(-2,0.5) 3(-2,0) 4(-2,-0.5) 5(-2,-1) 11(2,-1) 12(2,-0.5) 13(2,0) 14(2,0.5) 15(2,1)
  oval 0.25x0.8 smd: 6(-1,-2) 7(-0.5,-2) 8(0,-2) 9(0.5,-2) 10(1,-2) 16(1,2) 17(0.5,2) 18(0,2) 19(-0.5,2) 20(-1,2)
  rect 2.8x2.8 smd: 21(0,0)
  silkscreen extent -2.88,-2.1 2.1,2.1, body extent -2.07,-2.07 2.07,2.07, height 1
RB5-10.5 [mm] "Motor, General Kind; 2 Leads"
  round 1.5 hole 0.9: 1(-2.5,0) 2(2.5,0)
RESC1005X04L [mm] "Chip Resistor, Body 1.1x0.5mm, IPC High Density, EIA 0402"
  rect 0.6x0.6 smd: 1(-0.5,0) 2(0.5,0)
  body extent -0.55,-0.3 0.55,0.3, height 0.4
RESC1608X06L [mm] "Chip Resistor, Body 1.6x0.8mm, IPC High Density, EIA 0603"
  rect 0.7x0.9 smd: 1(-0.75,0) 2(0.75,0)
  silkscreen extent -0.01,-0.35 0.01,0.35, body extent -0.85,-0.48 0.85,0.48, height 0.6
RESC1608X06N [mm] "Chip Resistor, Body 1.6x0.8mm, IPC Medium Density, EIA 0603"
  rect 0.9x1 smd: 1(-0.85,0) 2(0.85,0)
  silkscreen extent -0.2,-0.4 0.2,0.4, body extent -0.85,-0.48 0.85,0.48, height 0.6
SOT23_N [mm] "SOT23, 3-Leads, Body 2.9x1.3mm, Pitch 0.95mm, Lead Span 2.3mm, IPC Medium Density"
  rect 1.3x0.6 smd: 1(-1.05,0.95) 2(-1.05,-0.95) 3(1.05,0)
  silkscreen extent -1.17,-1.5 0.7,1.92, body extent -0.7,-1.5 0.7,1.5, height 1.1
SOT50P160X80-3N [mm] "SOT523, 3-Leads, Body 1.7x1.8mm (max), Pitch 0.50mm, IPC Medium Density"
  rect 0.51x0.4 smd: 1(-0.65,0.5) 2(-0.65,-0.5) 3(0.65,0)
  silkscreen extent -0.77,-0.85 0.42,1.37, body extent -0.43,-0.85 0.42,0.85, height 0.8
SOT95P285X100-5N [mm] "SOT23, 5-Leads, Body 3.1x3.0mm (max), Pitch 0.95mm, IPC Medium Density"
  rect 1.05x0.6 smd: 1(-1.35,0.95) 2(-1.35,0) 3(-1.35,-0.95) 4(1.35,-0.95) 5(1.35,0.95)
  silkscreen extent -1.78,-1.55 0.4,1.65, body extent -0.87,-1.53 0.87,1.54, height 1
TQFP-PT64_N [mm] "Thin QFP, 64-Leads, Body 10x10mm, Pitch 0.5mm, IPC Medium Density"
  oval 1.8x0.3 smd: 1(-5.55,3.75) 2(-5.55,3.25) 3(-5.55,2.75) 4(-5.55,2.25) 5(-5.55,1.75) 6(-5.55,1.25) 7(-5.55,0.75) 8(-5.55,0.25) 9(-5.55,-0.25) 10(-5.55,-0.75) 11(-5.55,-1.25) 12(-5.55,-1.75) 13(-5.55,-2.25) 14(-5.55,-2.75) 15(-5.55,-3.25) 16(-5.55,-3.75) 33(5.55,-3.75) 34(5.55,-3.25) 35(5.55,-2.75) 36(5.55,-2.25) 37(5.55,-1.75) 38(5.55,-1.25) 39(5.55,-0.75) 40(5.55,-0.25) 41(5.55,0.25) 42(5.55,0.75) 43(5.55,1.25) 44(5.55,1.75) 45(5.55,2.25) 46(5.55,2.75) 47(5.55,3.25) 48(5.55,3.75)
  oval 0.3x1.8 smd: 17(-3.75,-5.55) 18(-3.25,-5.55) 19(-2.75,-5.55) 20(-2.25,-5.55) 21(-1.75,-5.55) 22(-1.25,-5.55) 23(-0.75,-5.55) 24(-0.25,-5.55) 25(0.25,-5.55) 26(0.75,-5.55) 27(1.25,-5.55) 28(1.75,-5.55) 29(2.25,-5.55) 30(2.75,-5.55) 31(3.25,-5.55) 32(3.75,-5.55) 49(3.75,5.55) 50(3.25,5.55) 51(2.75,5.55) 52(2.25,5.55) 53(1.75,5.55) 54(1.25,5.55) 55(0.75,5.55) 56(0.25,5.55) 57(-0.25,5.55) 58(-0.75,5.55) 59(-1.25,5.55) 60(-1.75,5.55) 61(-2.25,5.55) 62(-2.75,5.55) 63(-3.25,5.55) 64(-3.75,5.55)
  silkscreen extent -5.67,-4.25 4.25,4.58, body extent -5,-5 5,5, height 1.2
TSSOP-ST14_N [mm] "TSOP, 14-Leads, Body 5x4.4mm, Pitch 0.65mm, IPC Medium Density"
  oval 1.7x0.35 smd: 1(-2.85,1.95) 2(-2.85,1.3) 3(-2.85,0.65) 4(-2.85,0) 5(-2.85,-0.65) 6(-2.85,-1.3) 7(-2.85,-1.95) 8(2.85,-1.95) 9(2.85,-1.3) 10(2.85,-0.65) 11(2.85,0) 12(2.85,0.65) 13(2.85,1.3) 14(2.85,1.95)
  silkscreen extent -2.97,-2.55 1.6,2.8, body extent -2.25,-2.55 2.25,2.55, height 1.2
TYCO_7-215079-6 [mil] "Micro-Match 6 pins Female on board Vertical Truehole connector"
  rect 87x50 / inner rect 50x50 / far side rect 50x50 hole 31.5: 1(-50,125)
  oval 87x50 / inner round 50 / far side round 50 hole 31.5: 2(50,75) 3(-50,25) 4(50,-25) 5(-50,-75) 6(50,-125)
  round 0 hole 59.06 unplated mask+31.5: ""(20.98,184.02)
  silkscreen extent -119,-216 100,216, body extent -105,-220 105,220, height 283

## Part data
B1 B2: "Motor, General Kind"
BT1: "Multicell Battery"
C1 C3 C5 C6 C7 C8 C9 C10 C11 C12 C13 C14 C22 C23 C24 C25 C26 C27 C28 C29 C30 C33 C35 C36 C37 C38 C39 C40 C53 C54 C55 C62 C65 C66 C67 C68 C69 C70 C71: library part 100nF[[/\]]0603[[/\]]1, "Capacitor"
C2 C4 C34 C46 C51 C52: library part 10uF[[/\]]0603[[/\]]1, "Capacitor"
C15 C16 C17 C18 C19 C20 C21: library part CAP-NP, "Capacitor"
C31 C32 C43 C44 C45 C47 C48 C49 C50 C56: library part 4.7uF[[/\]]0603[[/\]]1, "Capacitor"
C41 C42: library part 10pF[[/\]]0603[[/\]]3
C57 C59 C64: library part 10nF[[/\]]0603[[/\]]1, "Capacitor"
C58: library part 470nF[[/\]]0603[[/\]]1, "Capacitor"
C60 C61 C63: library part 1uF[[/\]]0603[[/\]]1, "Capacitor"
D1 D3 D4 D5: library part LED, "SMD Red 0603 2V@20ma 56 mcd"
D2 D6 D27: library part "LED RGB SMD 2", "$0.027/2000k"
D7 D9 D10 D11 D12 D17 D18 D25 D26 D32 D35 D36: library part LED, "SMD Red led right angle mount 2V@20ma 57mcd"
D8 D28 D29 D30 D31: library part LED, "SMD Green led right angle mount 2V@20ma 35mcd"
D13 D14 D15 D16 D21 D22 D23 D24: library part LED, "SMD Green 0603 2V@20ma 20mcd"
D19 D20: library part LED, "Red led 2V@20ma 57mcd"
D33 D34: "Schottky Barrier Double Diode"
D37: library part LED, "SMD Blue led right angle mount 3.3V@20ma 28mcd"
J1 J2: "Solder Jump 3 pins"
LS1: "Loudspeaker"
MC1: library part Micro1, "Omnidirectional Back Electret Condenser Microphone"
Q1 Q2 Q3 Q4 Q5 Q6 Q7 Q8 Q9 Q10 Q11 Q12 Q13 Q14 Q15 Q16 Q17 Q18 Q19 Q20 Q21 Q22 Q23 Q24 Q25 Q26 Q27 Q28 Q29 Q30 Q31 Q32 Q33 Q34 Q35 Q36 Q37 Q38: "NPN General-purpose Transistor"
R1 R2 R57 R59 R61 R63 R64 R65 R92 R93 R94 R103 R104 R111 R112 R113 R114 R142: library part 4.7K[[/\]]0603[[/\]]1, "Resistor"
R3 R7 R8 R9 R10 R11 R12 R13 R14 R15 R16 R17 R18 R19 R20 R21 R22 R23 R24 R25 R26 R27 R28 R29 R30 R31 R36 R37 R38 R39 R40 R42 R43 R44 R45 R46 R47 R48 R49 R50 R51 R54 R55 R68 R69 R70 R71 R72 R73 R98 R99 R100: library part RES, "120"
R4 R5 R6: library part RES, "Resistor"
R32 R33 R34 R35 R41 R52 R53 R115 R116 R126: library part 2.2K[[/\]]0603[[/\]]1, "Resistor"
R56 R58 R60 R62 R66 R67 R74 R75 R76 R77 R78 R79 R80 R81 R82 R83 R84 R85 R86 R87 R88 R89 R90 R91 R95 R96 R97 R133 R134 R135: library part 68K[[/\]]0603[[/\]]1, "Resistor"
R101 R102 R136: library part 10K[[/\]]0603[[/\]]2, "Resistor"
R105: library part RES_ACORT, "Resistance"
R106 R107 R137: library part 180R[[/\]]0603[[/\]]1, "Resistor"
R108: library part 1K[[/\]]0603[[/\]]1, "Resistor"
R109 R110 R127 R128 R129 R141: library part 10K[[/\]]0603[[/\]]1, "Resistor"
R117 R118: library part 8.2K[[/\]]0603[[/\]]2, "Resistor"
R119 R120 R121 R122 R123 R124 R138 R139: library part 100K[[/\]]0603[[/\]]1, "Resistor"
R125: library part 470K[[/\]]0603[[/\]]1, "Resistor"
R130 R131 R132: library part 22K[[/\]]0603[[/\]]1, "Resistor"
R140: library part 270K[[/\]]0603[[/\]]2, "Resistor"
RT1: library part "Res Thermal", "Thermistors - NTC 10K OHM 1% 0402"
S1: library part "SD-Card-Micro-ASLTRON 5190008-XA4-R", "MicroSD Card connector 5190008-XA4-R"
T1 T2 T3 T4: "Transistor MOSFET 1 x P Pining : 1=G, 2=S, 3=D"
T5 T6 T7 T8: "Transistor MOSFET 1 x N, Pining : 1=G, 2=S, 3=D"
U1: "MMA7660FC: XYZ-AXIS  ACCELEROMETER  ±1.5 g"
U2 U3 U6 U7 U8 U9 U10 U11 U12: "Everlight Opto Interrupter"
U4 U5: "1 MHz, 85 µA Quad Op Amp, 14-Pin TSSOP, Extended Temperature Range, Tape and Reel"
U13 U14 U15 U16 U17: "8-Bit Serial-Input/Serial or Prallel-Output Shift Register with Latched 3-State Outputs"
U18 U22 U24: library part AP7331, "300mA, Low Quiescent Current, Fast Transient LDO"
U19: "General Purpose 16-Bit Flash Microcontroller with USB On-The-Go, 64KB Flash, 16KB SRAM, 64-Pin TQFP, Industrial Temperature"
U20: library part TSOP32236, "IR Receiver Module (36 kHz) for Remote Control Systems"
U21: "Stand-Alone System Load Sharing and Li-Ion/Li-Polymer Battery Charge Management Controller, 4.2V, 20-Pin QFN, Industrial Temperature"
U23: "USB/Charger and Over Voltage Detection Device"
U25: library part LM4819M, "350mW Audio Power Amplifier with Shutdown Mode"
X1: library part Con1x6_1, "1 x 6 pins connector"
X2: "1 x 6 pins connector"
X3: library part USB_MINIAB, "USB connector Micro B"
Y1: library part HC49/4H_SMX, "Surface Mount Quartz Crystal 8Mhz"

## Free pads (board coordinates)
  round 8 hole 5.6: 0(-42,-10) 1(42,-10) 2(-21,-76) 3(21,-76)
  round 2.4 hole 2: 0(-21.711,1.99) 0(-8.99,-28.711) 0(21.709,1.995)
  round 15 hole 15: 1(0,-55)

## Via types
v1: diameter 0.7, hole 0.3, Top Layer to Bottom Layer, 458 vias
v2: diameter 0.6, hole 0.3, Top Layer to Bottom Layer, 25 vias
v3: diameter 0.66, hole 0.33, Top Layer to Bottom Layer, tented top, 4 vias

## Nets (pads, with @x,y where several pads share a name; then routed paths per layer and width w, separated by ;. In a path a pad name is that pad's centre, name@x,y a point inside that pad or via, vN(x,y) a via of type N, cw(c..) or ccw(c..) an arc to the next point about the centre after c; other vN are vias at no path point)
AGND: C1.2 C2.2 C6.2 C10.2 C11.2 C12.2 C13.2 C14.2 C23.2 C24.2 C43.2 C50.2 C55.2 C63.2 C65.2 C66.2 C67.2 MC1.2 R4.1 R6.1 R12.2 R13.2 R14.2 R15.2 R16.2 R21.1 R22.1 R23.1 R24.1 R25.1 R27.2 R28.2 R29.2 R30.2 R31.2 R44.2 R45.2 R48.1 R49.1 R50.2 R51.2 R129.1 S1.6 U1.1 U1.4 U4.11 U5.11 U20.2 U24.2 | length 416
  Top Layer w0.3: v2(22.8,-23.5) 22.8,-23.3 23.15,-22.95 R25.1@23.625,-22.95 ; R48.1@23.475,-30.074 23.475,-30.25 24.3,-31.075 26.775,-31.075 28.6,-29.25 ; C1.2@28.225,-42.7 28.65,-42.275 U1.1@28.65,-41.325 28.65,-40.918 28.968,-40.6 29.832,-40.6 30.09,-40.858 30.09,-41.265 U1.4@30.15,-41.325 ; C67.2@28.6,-31.15 28.6,-29.25 ; C66.2@37.125,-28.6 36.949,-28.6 36.274,-27.925 35.326,-27.925 34.797,-27.396 34.797,-27.197 34.5,-26.9 U5.11@33.075,-26.9 30.95,-26.9 28.6,-29.25
  Top Layer w0.5: v1(-45.7,-6.075) -43.9,-4.275 -43.9,-3.734 -41.991,-1.825 -38.959,-1.825 -38.725,-1.591 -38.725,-0.659 -38.959,-0.425 -39.259,-0.425 -39.841,0.157 -39.461,0.538 -39.461,2.6 -33.461,8.6 C13.2@-28.45,8.6 -28.4,8.6 -27.306,9.694 -23.5,9.694 ; v1(-29.5,-71) -28.725,-71 C24.2@-28.45,-71.275 -25.194,-71.275 -24.869,-70.95 -18.908,-70.95 -18.583,-71.275 -18.1,-71.275 -18,-71.175 v1(-18,-71.1) ; v1(-23.5,6.5) -23.55,6.55 -23.55,9.644 -23.5,9.694 ; v1(-19.5,2.4) -19.5,2.375 -19.225,2.1 v1(-19.225,-8.875) ; S1.6@-12.2,-78 -12.05,-77.85 -12.05,-75.45 v1(-12.5,-75) -12.35,-74.85 -8.57,-74.85 -7.82,-75.6 -6.161,-75.6 -6.011,-75.75 -4.343,-75.75 -3.443,-74.85 -0.25,-74.85 0.35,-75.45 4.15,-75.45 v2(4.2,-75.4) ; v1(-7.4,-7.7) -7.3,-7.6 v1(-7.3,2.1) -7.3,10.7 ; v1(-0.775,12.025) v1@-0.767,12.033 ; v1(13,12.9) 13,14 ; U24.2@25.95,-49.525 26.2,-49.775 30.175,-49.775 C50.2@30.3,-49.9 32.55,-49.9 32.65,-50 ; C1.2@28.225,-42.7 C2.2@28.225,-44.1 30.125,-46 32.65,-46 ; v1(31.7,-70.7) 31.8,-70.8 31.8,-71.05 31.825,-71.075 C23.2@32.65,-71.075 32.65,-50 ; C66.2@37.125,-28.6 C66.2@37.15,-28.625 ; -23.5,9.694 -20.657,9.694 -19.53,10.821 -19.53,10.892 -17.922,12.5 -16,12.5 v1(-15,11.5) -14.2,10.7 -7.3,10.7 ; -7.3,10.7 -7.25,10.75 -2.15,10.75 C6.2@-2.1,10.7 1,13.8 9.477,13.8 9.677,14 13,14 ; 13,14 16.959,14 21.525,9.434 v1(21.525,8) C12.2@22.175,8.65 22.325,8.5 33.741,8.5 35.175,7.066 35.175,4.756 37.8,2.131 C10.2@37.8,1.55 37.8,1.466 40.075,-0.809 40.075,-2.766 40.309,-3 v1(42.5,-3) 43.493,-3 44.45,-3.957 44.45,-5.589 44.45,-6.227 44.873,-6.65 45.511,-6.65 45.532,-6.629 47.122,-6.629 49.093,-8.6 U20.2@50.5,-8.6 49.2,-9.9 49.2,-23.5 C65.2@49.35,-23.65 49.5,-23.8 MC1.2@49.5,-27.6 48.835,-27.6 44.885,-31.55 41.134,-31.55 38.425,-28.841 R129.1@38.425,-28.625 C66.2@37.15,-28.625 ; 32.65,-50 32.65,-46 ; 32.65,-46 32.65,-34.782 34.814,-32.618 36.001,-32.618 37.275,-31.344 37.275,-30.566 37.391,-30.45 37.425,-30.45 37.425,-28.9 C66.2@37.15,-28.625
  Bottom Layer w0.3: v2(22.8,-23.5) 22.6,-23.5 23.206,-24.106 23.688,-24.106 23.958,-24.375 23.958,-24.87 24.363,-25.275 24.51,-25.275 24.8,-25.565 24.8,-30.816 25.009,-31.025 v2(25.128,-31.025) ; R31.2@41.3,-3.525 R31.2@41.325,-3.525 ; R31.2@41.325,-3.525 41.925,-3.525 41.975,-3.525 v1(42.5,-3) 42.45,-3 42.281,-3 41.656,-2.375 R16.2@41.325,-2.375 R31.2@41.325,-3.525
  Bottom Layer w0.5: R27.2@-46.3,-6.95 -45.7,-6.35 v1(-45.7,-6.075) -46.275,-5.5 R12.2@-46.275,-5.225 ; v1(-29.5,-71) -28.6,-70.1 R50.2@-28.6,-69.475 ; R28.2@-24.425,7.2 -23.725,6.5 v1@-23.6,6.5 ; R13.2@-24.4,5.7 v1@-23.6,6.5 ; v1(-23.5,6.5) v1@-23.6,6.5 ; R21.1@-20.225,-7 -20.125,-7.1 -19.716,-7.1 -19.225,-7.591 v1(-19.225,-8.875) ; R22.1@-20.15,1.175 -18.675,2.65 -12.05,2.65 -11.5,2.1 ; v1(-18,-71.1) -18,-71.175 -18.1,-71.275 -17.925,-71.45 -16.389,-71.45 -16.214,-71.275 -14.725,-71.275 -11.8,-74.2 C63.2@-11.7,-74.2 C55.2@-11.7,-75.3 ; v1(-15,11.5) -14.875,11.625 R6.1@-13.975,11.625 ; C14.2@-12.85,0.75 -12.85,-2.211 -12.136,-2.925 U4.11@-10.451,-2.925 ; C14.2@-12.675,0.925 -11.5,2.1 ; v1(-12.5,-75) -12,-75 C55.2@-11.7,-75.3 ; C55.2@-11.7,-75.55 C55.2@-11.7,-75.3 ; v1(-7.4,-7.7) -7.3,-7.8 -6.7,-7.2 R24.1@-6.7,-6.925 ; R23.1@-6.575,0.891 -6.575,1.375 v1(-7.3,2.1) -11.5,2.1 ; R29.2@-2.1,10.3 -2.1,12.025 v1(-0.775,12.025) ; v2@4.2,-75.404 4.546,-75.75 6.611,-75.75 6.811,-75.55 10.66,-75.55 10.81,-75.4 11.79,-75.4 12.429,-76.039 12.429,-76.148 13.131,-76.85 15.769,-76.85 16.25,-76.369 16.25,-74.032 16.282,-74.001 16.282,-73.462 16.232,-73.413 16.232,-73.295 16.15,-73.213 16.15,-71.689 16.989,-70.85 30.525,-70.85 R45.2@30.775,-71.1 ; v1(13,12.9) R4.1@14.225,11.675 ; R30.2@20.625,6.875 20.65,6.9 20.65,8.575 21.225,8 v1(21.525,8) ; R45.2@30.775,-71.05 31,-70.825 31,-70.3 ; R51.2@30.9,-69.275 31,-69.375 31,-70.3 ; v1(31.7,-70.7) 31.8,-70.8 31.8,-71.05 31.775,-71.075 31,-70.3 ; R31.2@41.612,-3.838 41.925,-3.525 v1@42.45,-3 ; C43.2@48.775,-8.025 49.925,-8.025 U20.2@50.5,-8.6
BUTON1: U19.16 X1.4 X2.1 | length 34.2
  Top Layer w0.2: X1.4@0.735,-12.47 1.765,-13.5 2.128,-13.5 6.4,-17.772 6.4,-21.768 7.1,-22.468 7.1,-24.423 7.3,-24.623 7.3,-29.375 8.675,-30.75 9.799,-30.75 10.15,-31.101 10.15,-32.225 U19.16@11.35,-33.425
  Bottom Layer w0.2: X2.1@-3.175,-7 -2.075,-8.1 -0.644,-8.1 0.735,-9.479 X1.4@0.735,-12.47
BUTON2: U19.15 X1.5 X2.2 | length 33
  Top Layer w0.2: X1.5@2.005,-9.93 2.39,-10.315 2.39,-13.116 6.75,-17.476 6.75,-21.623 7.45,-22.323 7.45,-24.278 7.65,-24.478 7.65,-28.635 7.965,-28.95 8.191,-28.95 9.641,-30.4 9.944,-30.4 10.5,-30.957 10.5,-31.259 11.75,-32.509 11.75,-33.325 U19.15@11.85,-33.425
  Bottom Layer w0.2: X2.2@-1.905,-7 -1.696,-7 -0.946,-7.75 -0.499,-7.75 1.681,-9.93 X1.5@2.005,-9.93
BUTON3: U19.14 X2.4 | length 32.3
  Top Layer w0.2: X2.4@0.635,-7 1.555,-7.92 1.555,-8.228 4.16,-10.833 4.16,-12.95 8,-16.79 8,-16.872 7.1,-17.772 7.1,-21.478 7.8,-22.178 7.8,-24.133 8,-24.333 8,-28.49 8.11,-28.6 8.346,-28.6 9.796,-30.05 10.088,-30.05 10.85,-30.812 10.85,-31.104 12.35,-32.604 U19.14@12.35,-33.425
BUTON4: U19.13 X2.5 | length 32
  Top Layer w0.2: X2.5@1.905,-7 1.905,-8.083 4.51,-10.688 4.51,-12.805 8.35,-16.645 8.35,-17.017 7.45,-17.917 7.45,-21.333 8.2,-22.083 8.2,-22.485 8.35,-22.635 8.35,-22.712 8.15,-22.912 8.15,-23.988 8.35,-24.188 8.35,-28.109 9.941,-29.7 10.233,-29.7 11.2,-30.667 11.2,-30.959 12.85,-32.609 U19.13@12.85,-33.425
BUTON5: U19.12 X2.6 | length 31.7
  Top Layer w0.2: X2.6@3.175,-7 3.175,-8.858 4.86,-10.543 4.86,-12.66 8.7,-16.5 8.7,-17.162 7.8,-18.062 7.8,-21.188 8.55,-21.938 8.55,-22.34 8.7,-22.49 8.7,-22.857 8.5,-23.057 8.5,-23.844 8.7,-24.043 8.7,-27.959 10.091,-29.35 10.378,-29.35 11.55,-30.522 11.55,-30.809 13.25,-32.509 13.25,-33.325 U19.12@13.35,-33.425